# Altium PCB DevBoard.PcbDoc
Units mm, origin at the board's own origin, x right, y up, seen from the top; angles counter-clockwise.
Board outline 53.5 x 96.2 mm, 2 copper layers (Top Layer, Bottom Layer); 17 components, 33 nets, 114 pads, 0 vias.
Unrouted connection lines stored in the file: 10.
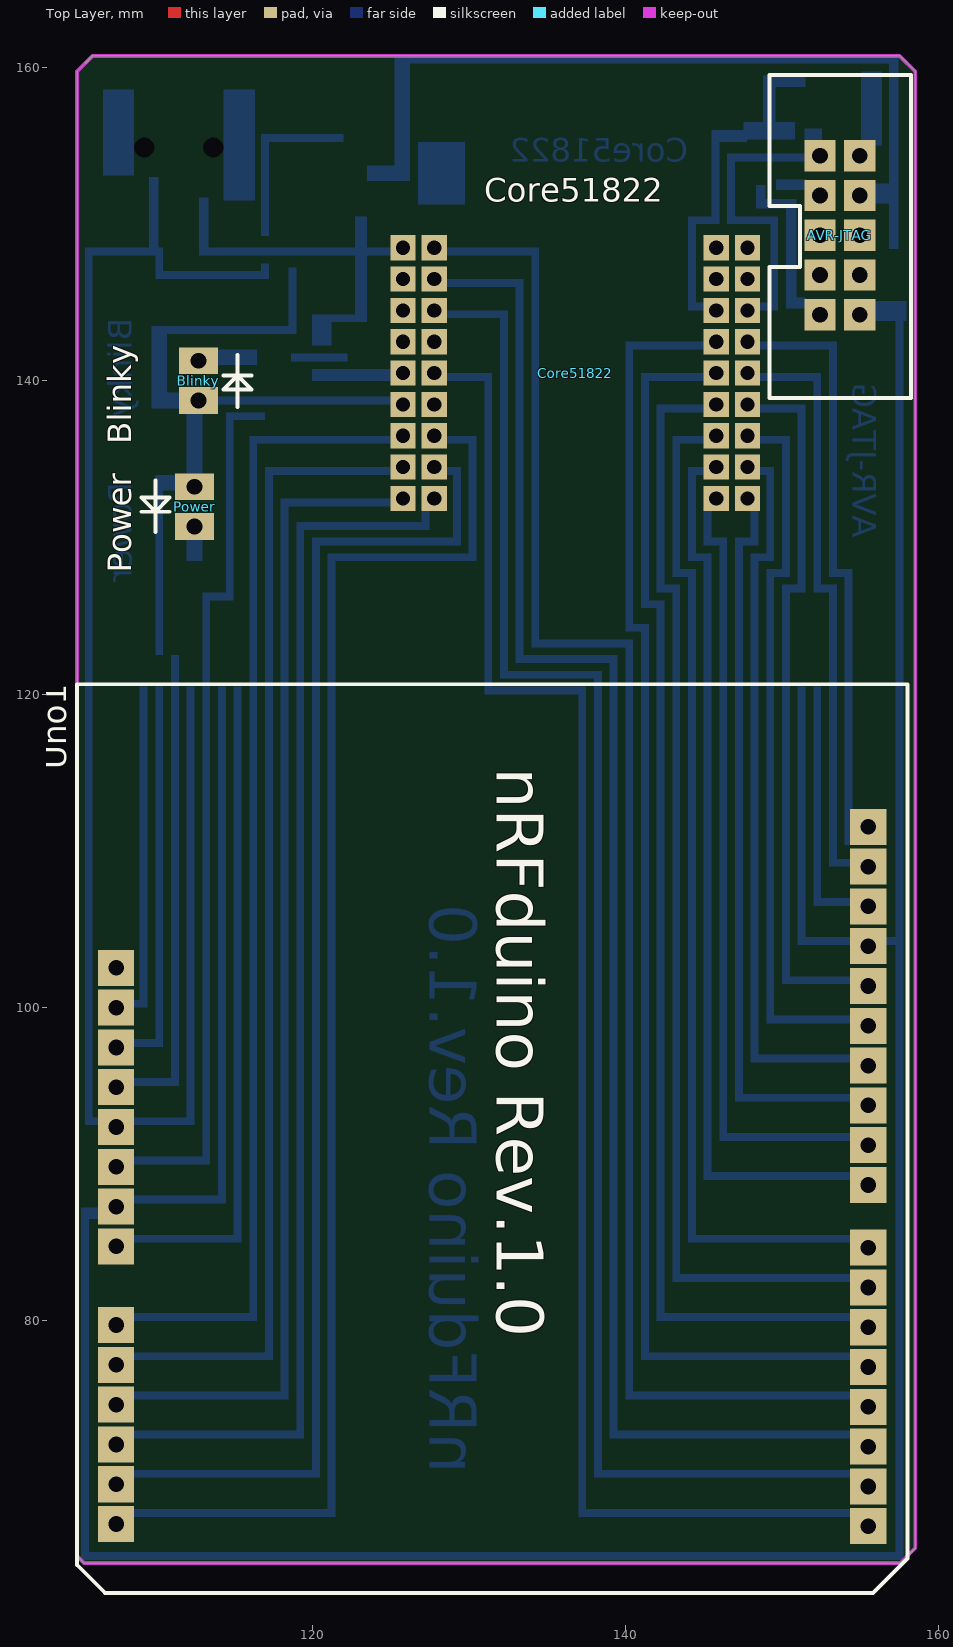
[diagram p0: Top Layer view]
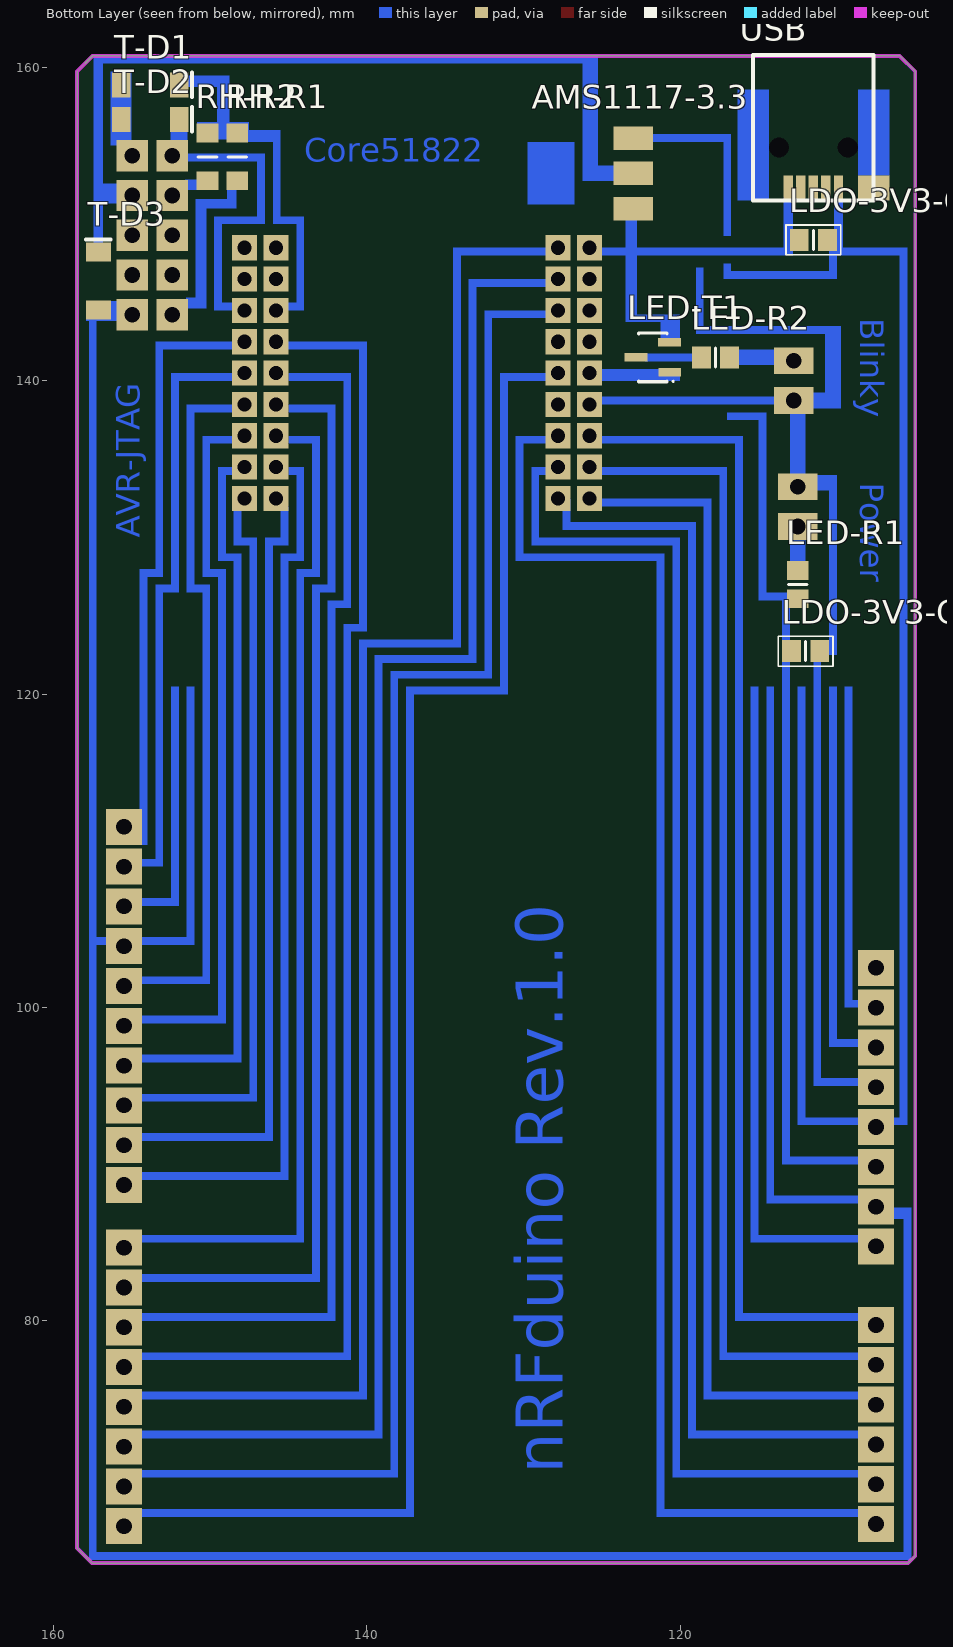
[diagram p1: Bottom Layer view, seen from below]
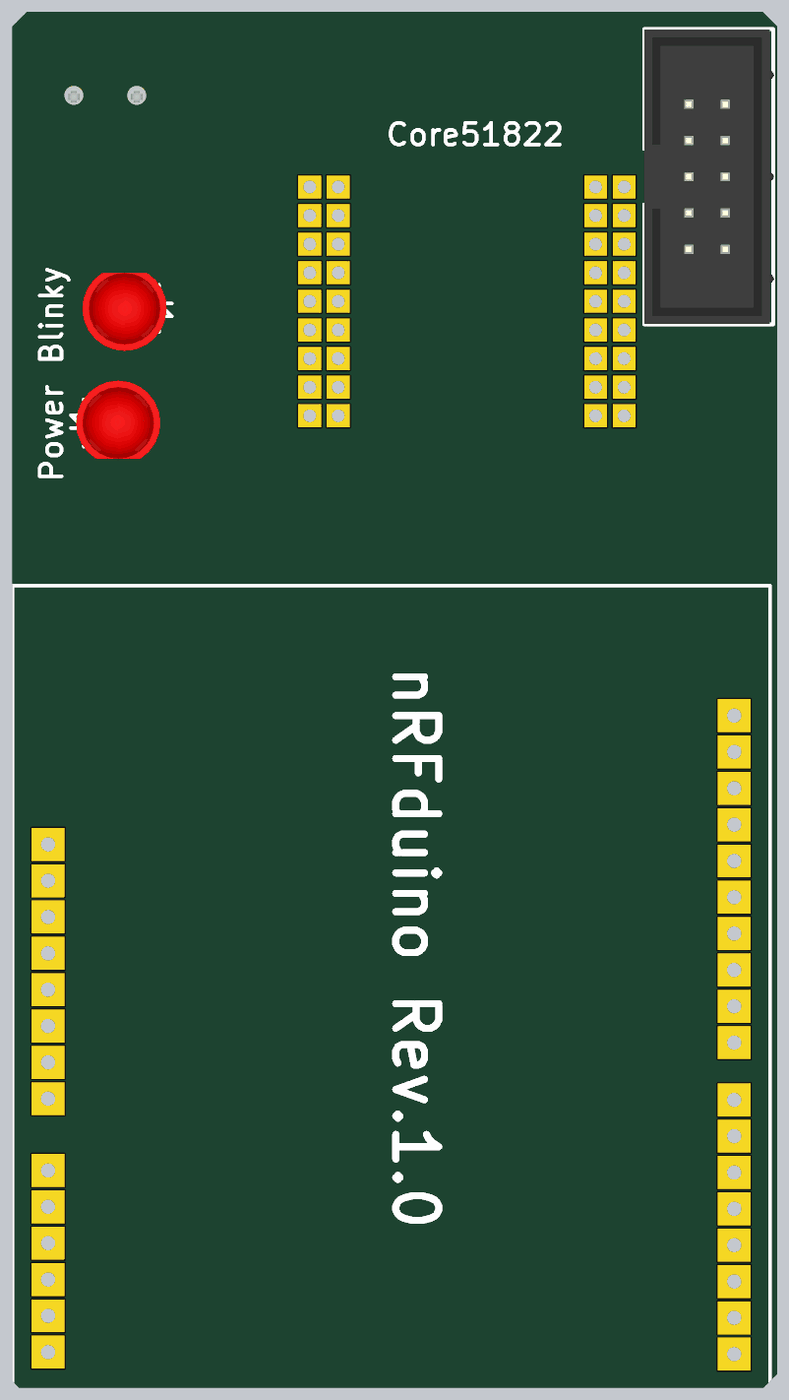
[diagram p2: 3D render of the assembled board from above, using the file's embedded part models]
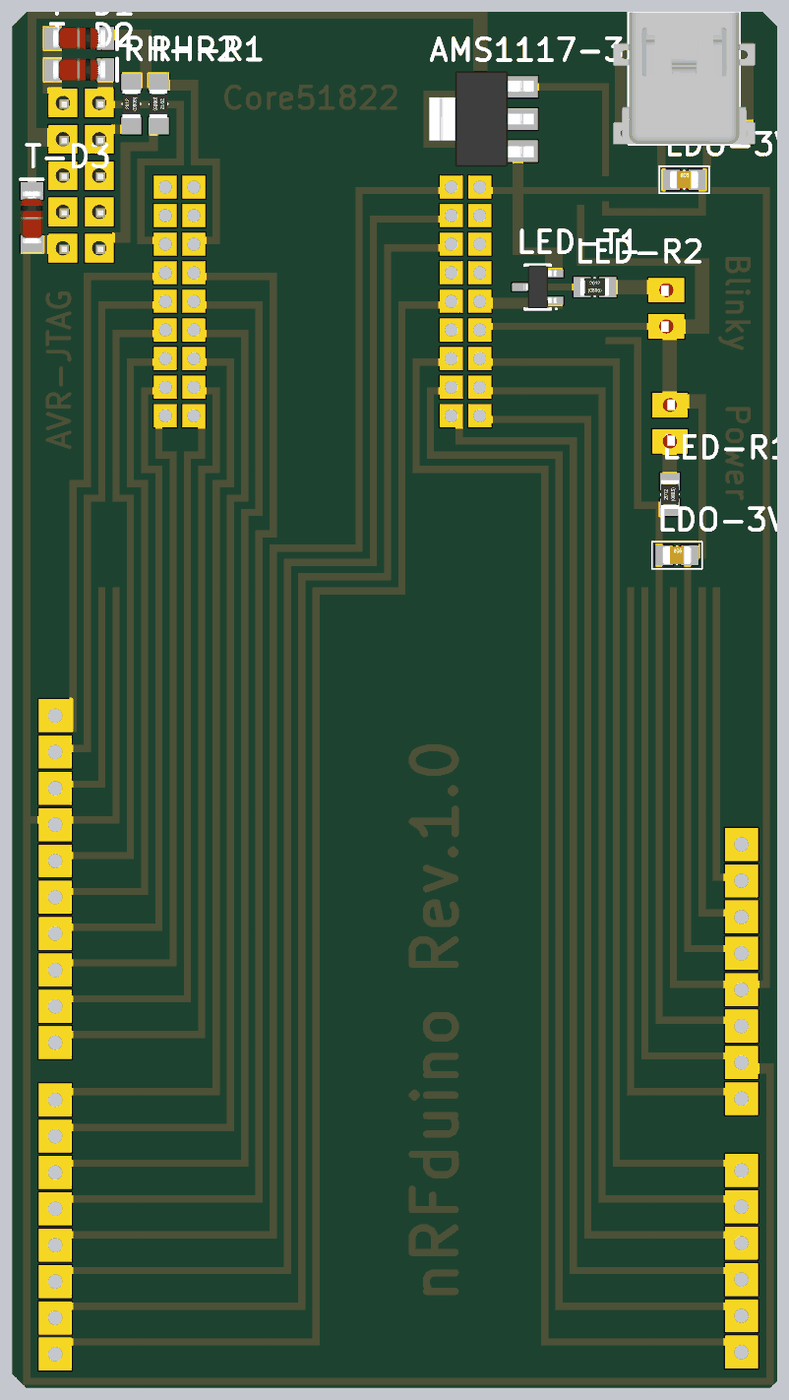
[diagram p3: 3D render of the assembled board from below, using the file's embedded part models]

## Layer stack, top to bottom
Top Solder: solder mask 0.0102, Solder Resist, Dk 3.5
Top Layer: signal copper 0.0356
Dielectric 1: dielectric 0.32, FR-4, Dk 4.8
Bottom Layer: signal copper 0.0356
Bottom Solder: solder mask 0.0102, Solder Resist, Dk 3.5

## Board outline
105,65 105.45,64.55 157.55,64.55 158.5,65.5 158.5,159.75 157.5,160.75 106,160.75 105,159.75

## Design rules (kind name [scope] priority, off if disabled: settings)
Clearance [All] p1: gap=0.254
PolygonConnect [All] p1: connectstyle=Relief reliefconductorwidth=0.254 reliefentries=4 polygonreliefangle="90 Angle" airgapwidth=0.254
RoomDefinition "Voltage Regulator" [InComponentClass('Voltage Regulator')] p1: confinementstyle=ConfineIn formatcopy=TRUE lockcomponents=FALSE outline 0,0 50.8,0 50.8,25.4 0,25.4
RoomDefinition USB [InComponentClass('USB')] p2: confinementstyle=ConfineIn formatcopy=TRUE lockcomponents=FALSE outline 0,0 50.8,0 50.8,25.4 0,25.4
RoomDefinition Top [InComponentClass('Top')] p3: confinementstyle=ConfineIn formatcopy=TRUE lockcomponents=FALSE outline 0,0 50.8,0 50.8,25.4 0,25.4
RoomDefinition Programmer [InComponentClass('Programmer')] p4: confinementstyle=ConfineIn formatcopy=TRUE lockcomponents=FALSE outline 0,0 50.8,0 50.8,25.4 0,25.4
RoomDefinition JTAG-to-SWD [InComponentClass('JTAG-to-SWD')] p5: confinementstyle=ConfineIn formatcopy=TRUE lockcomponents=FALSE outline 0,0 50.8,0 50.8,25.4 0,25.4
RoutingVias [All] p1: holewidth=0.711 width=1.27 viastyle="Through Hole" minholewidth=0.711 minwidth=1.27 maxholewidth=0.711 maxwidth=1.27
SolderMaskExpansion [All] p1: expansion=0.102
Width [All] p1: maxlimit=0.254 minlimit=0.254 preferedwidth=0.254
30 further rules are at their usual default settings.

## Classes and differential pairs
component class "Voltage Regulator": AMS1117-3.3 LDO-3V3-C1 LDO-3V3-C2
component class USB: LED-R1 Power USB
component class Top: Blinky Core51822 LED-R2 LED-T1 Uno1
component class JTAG-to-SWD: RH-R1 RH-R2
component class Programmer: AVR-JTAG T-D1 T-D2 T-D3

## Components (designator, comment, footprint, x,y, rotation, side; value= is the part's Value field where it differs from the comment)
AMS1117-3.3 "AMS1117" SOT-223-3 122.25,150 r90 bottom
AVR-JTAG "AVR Style" "Header 2x5 IDC-10S" 152.425,154.375 r0 top
Blinky "TH Blue" "LED 3mm" 112.75,138.75 r90 top
Core51822 "Core51822_2" Core51822 124.8,131.5 r0 top
LDO-3V3-C1 "1uF" "C 0805 / 2012" 111.5,149 r180 bottom
LDO-3V3-C2 "1uF" "C 0805 / 2012" 112,122.75 r180 bottom
LED-R1 "?R" "R 0805 / 2012" 112.5,127 r90 bottom
LED-R2 "?R" "R 0805 / 2012" 117.75,141.5 r180 bottom
LED-T1 "2N7000" SOT-23-3 121.75,141.5 r90 bottom
Power "TH Green" "LED 3mm" 112.5,133.25 r270 top
RH-R1 "390R" "R 0805 / 2012 wide" 148.275,154.3 r270 bottom
RH-R2 "390R" "R 0805 / 2012 wide" 150.175,154.3 r90 bottom
T-D1 "BZV55-B3V3" Minimelf 153.825,158.875 r0 bottom
T-D2 "BZV55-B3V3" Minimelf 153.825,156.675 r0 bottom
T-D3 "BZV55-B3V3" Minimelf 157.125,146.375 r270 bottom
Uno1 "Arduino Uno" "ARDUINO UNO ADAPTER" 131.5,93 r270 top
USB "P-miniUSB" miniUSB 111.5,156 r0 bottom

## Footprints (in the part's own frame and the unit in brackets; to place one, negate y for a bottom-side part, rotate by r counter-clockwise, add the part's x,y. Pads: shape width x height; smd on the part's side, far side on the other; paste and mask are expansions set on the pad)
"ARDUINO UNO ADAPTER" [mm]
  rect 2.3x2.3 hole 1: 0(26.1,24) 1(23.56,24) 2(21.02,24) 3(18.48,24) 3V3(-1.92,-24) 4(15.94,24) 5(13.4,24) 5V(0.62,-24) 6(10.86,24) 7(8.32,24) 8(4.32,24) 9(1.78,24) 10(-0.76,24) 11(-3.3,24) 12(-5.84,24) 13(-8.38,24) A0(13.26,-24) A1(15.8,-24) A2(18.34,-24) A3(20.88,-24) A4(23.42,-24) A5(25.96,-24) AREF(-13.46,24) GND1(3.16,-24) GND2(5.7,-24) GND3(-10.92,24) IOREF(-7,-24) NC(-9.54,-24) RESET(-4.46,-24) SCL(-18.54,24) SDA(-16,24) Vin(8.24,-24)
  Bottom Layer region: -16.5,21.5 -16,21.5 -16,23 -16.5,23
  Bottom Layer region: -27.5,21.5 -16,21.5 -16,22 -27.5,22
  Bottom Layer region: -27.5,22.5 -17.39,22.5 -17.39,23 -27.5,23
  Bottom Layer region: -27.5,20.5 -13.5,20.5 -13.5,21 -27.5,21
  Bottom Layer region: -27.5,19.5 -11,19.5 -11,20 -27.5,20
  Bottom Layer region: -27.5,18.5 -8.5,18.5 -8.5,19 -27.5,19
  Bottom Layer region: -27.5,17.5 -6,17.5 -6,18 -27.5,18
  Bottom Layer region: -27.5,16.5 -3.5,16.5 -3.5,17 -27.5,17
  Bottom Layer region: -27.5,15.5 -1,15.5 -1,16 -27.5,16
  Bottom Layer region: -27.5,14.5 1.5,14.5 1.5,15 -27.5,15
  Bottom Layer region: -27.5,13.5 4,13.5 4,14 -27.5,14
  Bottom Layer region: -27.5,12.5 8,12.5 8,13 -27.5,13
  Bottom Layer region: -27.5,11.5 10.5,11.5 10.5,12 -27.5,12
  Bottom Layer region: -27.5,10.5 13,10.5 13,11 -27.5,11
  Bottom Layer region: -27.5,5.5 25.5,5.5 25.5,6 -27.5,6
  Bottom Layer region: -27.5,6.5 23,6.5 23,7 -27.5,7
  Bottom Layer region: -27.5,7.5 20.5,7.5 20.5,8 -27.5,8
  Bottom Layer region: -27.5,8.5 18,8.5 18,9 -27.5,9
  Bottom Layer region: -27.5,9.5 15.5,9.5 15.5,10 -27.5,10
  Bottom Layer region: -14,20.5 -13.5,20.5 -13.5,23 -14,23
  Bottom Layer region: -11.5,19.5 -11,19.5 -11,23 -11.5,23
  Bottom Layer region: -9,18.5 -8.5,18.5 -8.5,23 -9,23
  Bottom Layer region: -6.5,17.5 -6,17.5 -6,23 -6.5,23
  Bottom Layer region: -4,16.5 -3.5,16.5 -3.5,23 -4,23
  Bottom Layer region: -1.5,15.5 -1,15.5 -1,23 -1.5,23
  Bottom Layer region: 1,14.5 1.5,14.5 1.5,23 1,23
  Bottom Layer region: 3.5,13.5 4,13.5 4,23 3.5,23
  Bottom Layer region: 7.5,12.5 8,12.5 8,23 7.5,23
  Bottom Layer region: 17.5,-23.5 18,-23.5 18,-13 17.5,-13
  Bottom Layer region: 15,-23.5 15.5,-23.5 15.5,-14 15,-14
  Bottom Layer region: 12.5,-23.5 13,-23.5 13,-15 12.5,-15
  Bottom Layer region: 7.5,-23.5 8,-23.5 8,-16 7.5,-16
  Bottom Layer region: 5,-23.5 5.5,-23.5 5.5,-17 5,-17
  Bottom Layer region: 2.5,-23.5 3,-23.5 3,-18 2.5,-18
  Bottom Layer region: 0,-23.5 0.5,-23.5 0.5,-19 0,-19
  Bottom Layer region: -2.5,-23.5 -2,-23.5 -2,-20 -2.5,-20
  Bottom Layer region: -5,-23.5 -4.5,-23.5 -4.5,-21 -5,-21
  Bottom Layer region: -27.5,-10.5 25.5,-10.5 25.5,-10 -27.5,-10
  Bottom Layer region: -27.5,-11.5 23,-11.5 23,-11 -27.5,-11
  Bottom Layer region: -27.5,-12.5 20.5,-12.5 20.5,-12 -27.5,-12
  Bottom Layer region: -27.5,-13.5 18,-13.5 18,-13 -27.5,-13
  Bottom Layer region: -27.5,-14.5 15.5,-14.5 15.5,-14 -27.5,-14
  Bottom Layer region: -27.5,-15.5 13,-15.5 13,-15 -27.5,-15
  Bottom Layer region: -27.5,-16.5 8,-16.5 8,-16 -27.5,-16
  Bottom Layer region: -27.5,-17.5 5.5,-17.5 5.5,-17 -27.5,-17
  Bottom Layer region: -27.5,-18.5 3,-18.5 3,-18 -27.5,-18
  Bottom Layer region: -27.5,-19.5 0.5,-19.5 0.5,-19 -27.5,-19
  Bottom Layer region: -27.5,-20.5 -2,-20.5 -2,-20 -27.5,-20
  Bottom Layer region: -27.5,-21.5 -4.5,-21.5 -4.5,-21 -27.5,-21
  Bottom Layer region: -27.5,-22.5 -7,-22.5 -7,-22 -27.5,-22
  Bottom Layer region: -7.5,-23.5 -7,-23.5 -7,-22 -7.5,-22
  Bottom Layer region: 20,-24 20.5,-24 20.5,-12 20,-12
  Bottom Layer region: 22.5,-24 23,-24 23,-11 22.5,-11
  Bottom Layer region: 25,-24 25.5,-24 25.5,-10 25,-10
  Bottom Layer region: 25,5.5 25.5,5.5 25.5,23 25,23
  Bottom Layer region: 22.5,6.5 23,6.5 23,23 22.5,23
  Bottom Layer region: 20,7.5 20.5,7.5 20.5,23 20,23
  Bottom Layer region: 17.5,8.5 18,8.5 18,23 17.5,23
  Bottom Layer region: 15,9.5 15.5,9.5 15.5,23 15,23
  Bottom Layer region: 12.5,10.5 13,10.5 13,23 12.5,23
  Bottom Layer region: 10,11.5 10.5,11.5 10.5,23 10,23
  silkscreen extent -27.64,-26.5 30.36,26.5
"C 0805 / 2012" [mm] "Capacitor 0805 / 2012 (2.0 x 1.2 mm)"
  rect 1.2x1.4 smd: 1(-0.9,0) 2(0.9,0)
  silkscreen extent -1.75,-0.95 1.75,0.95, body extent -1,-0.62 1,0.63, height 0.78
Core51822 [mm]
  rect 1.6x1.6 hole 0.9: 1(1,17) 2(3,17) 3(1,15) 4(3,15) 5(1,13) 6(3,13) 7(1,11) 8(3,11) 9(1,9) 10(3,9) 11(1,7) 12(3,7) 13(1,5) 14(3,5) 15(1,3) 16(3,3) 17(1,1) 18(3,1) 19(21,17) 20(23,17) 21(21,15) 22(23,15) 23(21,13) 24(23,13) 25(21,11) 26(23,11) 27(21,9) 28(23,9) 29(21,7) 30(23,7) 31(21,5) 32(23,5) 33(21,3) 34(23,3) 35(21,1) 36(23,1)
"Header 2x5 IDC-10S" [mm]
  rect 2x2 hole 1: 1(0,0) 2(2.54,0) 3(0,-2.54) 4(2.54,-2.54) 5(0,-5.08) 6(2.54,-5.08) 7(0,-7.62) 8(2.54,-7.62) 9(0,-10.16) 10(2.54,-10.16)
  silkscreen extent -3.22,-15.48 5.8,5.16, body extent -3.22,-15.46 5.88,5.14, height 9.3
"LED 3mm" [mm] "2.54mm"
  rect 1.7x2.5 hole 1: 1(0,0) 2(2.54,0)
  silkscreen extent -0.4,-3.4 2.9,-1.6, body extent -1.71,-3.05 3.74,2.85, height 18.6
Minimelf [mm]
  rect 1.2x1.6 smd: 1(-1.85,-0.013) 2(1.85,-0.013)
  silkscreen extent -2.65,-0.8 -2.65,0.75, body extent -1.85,-0.8 1.85,0.77, height 1.6
miniUSB [mm]
  rect 0.6x1.6 smd: 1(-1.6,3.7) 2(-0.8,3.7) 3(0,3.7) 4(0.8,3.7) 5(1.6,3.7)
  rect 2x1.6 smd: 6(-3.85,3.7)
  rect 0x0 hole 1.3: 10(-2.2,1.1) 20(2.2,1.1)
  Top Layer region: -4.85,2.9 -2.85,2.9 -2.85,-2.6 -4.85,-2.6
  Top Layer region: 2.85,4.5 4.85,4.5 4.85,-1 2.85,-1
  Top Layer region: 2.85,-1 4.85,-1 4.85,-2.6 2.85,-2.6
  silkscreen extent -3.85,-4.8 3.85,4.5, body extent -4.95,-4.7 4.95,4.5, height 4.14
"R 0805 / 2012" [mm] "Resistor 0805 / 2012 (2.0 x 1.2 mm)"
  rect 1.2x1.4 smd: 1(-0.9,0) 2(0.9,0)
  silkscreen extent 0,-0.6 0,0.6, body extent -1,-0.63 1,0.62, height 0.45
"R 0805 / 2012 wide" [mm] "Resistor 0805 / 2012 (2.0 x 1.2 mm)"
  rect 1.2x1.4 smd: 1(-1.524,0) 2(1.524,0)
  silkscreen extent 0,-0.6 0,0.6, body extent -1,-0.63 1,0.62, height 0.45
SOT-23-3 [mm]
  rect 0.55x1.45 smd: 1(-0.95,-1.075) 2(0.965,-1.067) 3(0,1.067)
  silkscreen extent -1.57,-1.35 1.55,0.9, body extent -1.49,-1.32 1.51,1.28, height 1.1
SOT-223-3 [mm]
  rect 1.5x2.5 smd: 1(1,0.75) 2(3.25,0.75) 3(5.5,0.75)
  Top Layer region: 1.25,7.5 5.25,7.5 5.25,4.5 1.25,4.5
  body extent -0.1,-0.22 6.6,7.08, height 1.8

## Part data
AMS1117-3.3: "LDO 3.3V/5V/12V"
AVR-JTAG: library part "Header JTAG AVR"
Blinky Power: library part LED
LDO-3V3-C1 LDO-3V3-C2: library part Capacitor
LED-R1 LED-R2 RH-R1 RH-R2: library part Resistor
LED-T1: "N-FET"
T-D1 T-D2 T-D3: library part "Zener Diode"
USB: library part miniUSB

## Nets (pads, with @x,y where several pads share a name; then routed paths per layer and width w, separated by ;. In a path a pad name is that pad's centre, name@x,y a point inside that pad or via, vN(x,y) a via of type N, cw(c..) or ccw(c..) an arc to the next point about the centre after c; other vN are vias at no path point)
3.3V: AMS1117-3.3.2 AVR-JTAG.4 AVR-JTAG.7 Blinky.1 Core51822.11 LDO-3V3-C2.2 Power.1 T-D3.1 Uno1.3V3 Uno1.IOREF
5V: AMS1117-3.3.3 LDO-3V3-C1.2 Uno1.5V USB.1
GND: AMS1117-3.3.1 AVR-JTAG.2 AVR-JTAG.10 Core51822.1 LDO-3V3-C1.1 LDO-3V3-C2.1 LED-R1.1 LED-T1.2 T-D1.2 T-D2.2 T-D3.2 Uno1.GND1 Uno1.GND2 Uno1.GND3 USB.5
NetBlinky_2: Blinky.2 LED-R2.2
NetCore51822_2: Core51822.2 Uno1.3
NetCore51822_4: Core51822.4 Uno1.2
NetCore51822_5: Core51822.5 LED-T1.1
NetCore51822_6: Core51822.6 Uno1.1
NetCore51822_10: Core51822.10 Uno1.0
NetCore51822_13: Core51822.13 Uno1.A0
NetCore51822_14: Core51822.14 Uno1.A5
NetCore51822_15: Core51822.15 Uno1.A1
NetCore51822_16: Core51822.16 Uno1.A4
NetCore51822_17: Core51822.17 Uno1.A2
NetCore51822_18: Core51822.18 Uno1.A3
NetCore51822_25: Core51822.25 Uno1.4
NetCore51822_26: Core51822.26 Uno1.SCL
NetCore51822_27: Core51822.27 Uno1.5
NetCore51822_28: Core51822.28 Uno1.SDA
NetCore51822_29: Core51822.29 Uno1.6
NetCore51822_30: Core51822.30 Uno1.13
NetCore51822_31: Core51822.31 Uno1.7
NetCore51822_32: Core51822.32 Uno1.12
NetCore51822_33: Core51822.33 Uno1.8
NetCore51822_34: Core51822.34 Uno1.11
NetCore51822_35: Core51822.35 Uno1.9
NetCore51822_36: Core51822.36 Uno1.10
NetLED-R1_2: LED-R1.2 Power.2
NetLED-R2_1: LED-R2.1 LED-T1.3
SWDCLK: AVR-JTAG.1 Core51822.24 T-D2.1
SWDIO: Core51822.23 RH-R1.1 RH-R2.2 T-D1.1
TDI: AVR-JTAG.9 RH-R1.2
TDO: AVR-JTAG.3 RH-R2.1
pads on no net: AVR-JTAG.5 AVR-JTAG.6 AVR-JTAG.8 Core51822.3 Core51822.7 Core51822.8 Core51822.9 Core51822.12 Core51822.19 Core51822.20 Core51822.21 Core51822.22 Uno1.AREF Uno1.NC Uno1.RESET Uno1.Vin USB.2 USB.3 USB.4 USB.6 USB.10 USB.20

## Keep-outs
Keep-Out Layer:
  the board outline again, w0.254

## Other copper
Bottom Layer:
  region net TDO: 151.6,152.85 149.6,152.85 149.6,152.2 151.6,152.2
  rectangle net 5V: 110,147 110.5,148.5
  rectangle net 5V: 110,146.5 116.75,147
  rectangle net 5V: 116.75,146.5 117.25,147.5
  rectangle net 5V: 116.75,149.25 117.25,155.25
  rectangle net 5V: 116.75,155.25 122,155.75
  rectangle net 3.3V: 123.5,152.75 125.25,153.75
  rectangle net 3.3V: 125.25,152.75 126.25,160.25
  rectangle net GND: 121.25,143.75 122.75,144.25
  rectangle net GND: 120,142.25 121.25,144.25
  rectangle net GND: 122.75,143.75 123.5,150.5
  rectangle net 3.3V: 125.25,160.25 156.835,160.75
  region net GND: 157.935,145.116 155.535,145.116 155.535,143.816 157.935,143.816
  rectangle net GND: 105.75,86.5 106.5,87.25
  rectangle net GND: 105.25,64.75 105.75,87.25
  rectangle net GND: 105.75,64.75 157.25,65.25
  rectangle net GND: 157.25,64.75 157.75,144.525
  rectangle net GND: 156.5,104 157.75,104.5
  region net 3.3V: 157.135,152.616 155.735,152.616 155.735,151.316 157.135,151.316
  region net 3.3V: 157.435,160.75 156.835,160.75 156.835,148.416 157.435,148.416
  rectangle net SWDIO: 146,155.25 147.75,156
  rectangle net SWDIO: 145.5,150.5 146,156
  rectangle net SWDIO: 144.5,150 146,150.5
  rectangle net SWDIO: 144,145 144.5,150.5
  rectangle net SWDIO: 144,144.5 145.25,145
  region net SWDIO: 149.575,159.5 148.775,159.5 148.775,155.9 149.575,155.9
  region net SWDIO: 151.5,159.5 149.4,159.5 149.4,158.75 151.5,158.75
  region net TDI: 148.935,152.516 148.335,152.516 148.335,151.016 148.935,151.016
  region net TDI: 151.535,145.316 150.235,145.316 150.235,144.616 151.535,144.616
  region net TDI: 150.935,151.616 150.235,151.616 150.235,145.316 150.935,145.316
  region net TDI: 150.335,151.616 148.935,151.616 148.935,151.016 150.335,151.016
  region net SWDCLK: 152.535,156.116 151.435,156.116 151.435,155.316 152.535,155.316
  rectangle net SWDCLK: 149.25,145 149.75,150.25
  rectangle net SWDCLK: 148,144.5 149.75,145
  rectangle net SWDCLK: 146.5,150 149.75,150.5
  rectangle net SWDCLK: 146.5,150 147,154.5
  rectangle net GND: 115,137.5 117,138
  rectangle net GND: 114.5,126.5 115,138
  rectangle net GND: 113.5,126 115,126.5
  rectangle net NetLED-R1_2: 112,128.5 113,130
  rectangle net 3.3V: 110,133 111.5,134
  rectangle net 3.3V: 110,122.5 110.5,134
  rectangle net 3.3V: 111,120 111.5,122.5
  rectangle net GND: 113,120 113.5,126.5
  rectangle net 3.3V: 112,138.5 125.5,139
  rectangle net 3.3V: 109.75,138.25 110.75,143.5
  rectangle net 5V: 105.75,148 109.9,148.5
  rectangle net 5V: 109.6,148 110.2,153
  rectangle net GND: 113.25,148 125.25,148.5
  rectangle net GND: 112.8,148 113.4,151.7
  rectangle net 5V: 105.5,93 106,148.5
  rectangle net 5V: 105.5,92.5 106.5,93
  region net GND: 156.375,159.75 155.035,159.75 155.035,155.016 156.375,155.016
  region: 155.835,156.316 155.135,156.316 155.135,155.316 155.835,155.316
  region net SWDIO: 150.835,156.516 147.535,156.516 147.535,155.416 150.835,155.416
  rectangle net SWDCLK: 146.723,154 151.803,154.5
  rectangle net NetCore51822_36: 147,129.5 148.5,130
  rectangle net NetCore51822_34: 148,128.5 149.5,129
  rectangle net NetCore51822_32: 149,127.5 150.5,128
  rectangle net NetCore51822_30: 150,126.5 151.5,127
  rectangle net NetCore51822_28: 152,126.5 153.5,127
  rectangle net NetCore51822_26: 153,127.5 154.5,128
  rectangle net NetCore51822_26: 154,120 154.5,128
  rectangle net NetCore51822_26: 153,127.5 153.5,131
  rectangle net NetCore51822_28: 152,126.5 152.5,131
  rectangle net NetCore51822_28: 153,120 153.5,127
  rectangle net NetCore51822_30: 151,126.5 151.5,131
  rectangle net NetCore51822_30: 150,120 150.5,127
  rectangle net NetCore51822_32: 150,127.5 150.5,131
  rectangle net NetCore51822_32: 149,120 149.5,128
  rectangle net NetCore51822_34: 148,120 148.5,129
  rectangle net NetCore51822_34: 149,128.5 149.5,131
  rectangle net NetCore51822_36: 148,129.5 148.5,131
  rectangle net NetCore51822_36: 147,120 147.5,130
  rectangle net NetCore51822_33: 144,128.5 145.5,129
  rectangle net NetCore51822_31: 143,127.5 144.5,128
  rectangle net NetCore51822_29: 142,126.5 143.5,127
  rectangle net NetCore51822_27: 141,125.5 142.5,126
  rectangle net NetCore51822_35: 145,129.5 146.5,130
  rectangle net NetCore51822_35: 146,120 146.5,130
  rectangle net NetCore51822_35: 145,129.5 145.5,131
  rectangle net NetCore51822_33: 144,128.5 144.5,131
  rectangle net NetCore51822_33: 145,120 145.5,129
  rectangle net NetCore51822_31: 144,120 144.5,128
  rectangle net NetCore51822_31: 143,127.5 143.5,131
  rectangle net NetCore51822_29: 142,126.5 142.5,131
  rectangle net NetCore51822_29: 143,120 143.5,127
  rectangle net NetCore51822_27: 142,120 142.5,126
  rectangle net NetCore51822_27: 141,125.5 141.5,131
  rectangle net NetCore51822_25: 140,124 140.5,131
  rectangle net NetCore51822_25: 141,120.5 141.5,124
  rectangle net NetCore51822_13: 116,120 116.5,136.5
  rectangle net NetCore51822_13: 116.5,136 125,136.5
  rectangle net NetCore51822_15: 117,120 117.5,134.5
  rectangle net NetCore51822_15: 117.5,134 125,134.5
  rectangle net NetCore51822_17: 118,132 125,132.5
  rectangle net NetCore51822_17: 118,120 118.5,132
  rectangle net NetCore51822_18: 127,130.5 127.5,132.5
  rectangle net NetCore51822_18: 119,130.5 127,131
  rectangle net NetCore51822_18: 119,120 119.5,130.5
  rectangle net NetCore51822_16: 120,120 120.5,130
  rectangle net NetCore51822_16: 120.5,129.5 129.5,130
  rectangle net NetCore51822_16: 129,130 129.5,134.5
  rectangle net NetCore51822_16: 127.5,134 129,134.5
  rectangle net NetCore51822_14: 121,120 121.5,129
  rectangle net NetCore51822_14: 121.5,128.5 130.5,129
  rectangle net NetCore51822_14: 130,128.5 130.5,136.5
  rectangle net NetCore51822_14: 128,136 130,136.5
  rectangle net NetCore51822_10: 131,120 131.5,140
  rectangle net NetCore51822_10: 128,140 131.5,140.5
  rectangle net NetCore51822_6: 132,121 132.5,144
  rectangle net NetCore51822_6: 128,144 132.5,144.5
  rectangle net NetCore51822_4: 128,146 133.5,146.5
  rectangle net NetCore51822_4: 133,122 133.5,146.5
  rectangle net NetCore51822_35: 145,130.5 145.5,132
  rectangle net NetCore51822_33: 144,134 145,134.5
  rectangle net NetCore51822_33: 144,130.5 144.5,134
  rectangle net NetCore51822_31: 143,136 145,136.5
  rectangle net NetCore51822_31: 143,130.5 143.5,136
  rectangle net NetCore51822_29: 142,138 145,138.5
  rectangle net NetCore51822_29: 142,130.5 142.5,138
  rectangle net NetCore51822_27: 141,140 145,140.5
  rectangle net NetCore51822_27: 141,130.5 141.5,140
  rectangle net NetCore51822_25: 140,142 145.5,142.5
  rectangle net NetCore51822_25: 140,130.5 140.5,142
  rectangle net NetCore51822_2: 128,148 134.5,148.5
  rectangle net NetCore51822_2: 134,123 134.5,148
  rectangle net NetCore51822_34: 148,134 149.5,134.5
  rectangle net NetCore51822_34: 149,130.5 149.5,134
  rectangle net NetCore51822_36: 148,130.5 148.5,132
  rectangle net NetCore51822_32: 148,136 150.5,136.5
  rectangle net NetCore51822_32: 150,130.5 150.5,136
  rectangle net NetCore51822_30: 148,138 151.5,138.5
  rectangle net NetCore51822_30: 151,130.5 151.5,138
  rectangle net NetCore51822_28: 148,140 152.5,140.5
  rectangle net NetCore51822_28: 152,130.5 152.5,140
  rectangle net NetCore51822_26: 148,142 153.5,142.5
  rectangle net NetCore51822_26: 153,130.5 153.5,142
  rectangle: 140,124 141.5,124.5
  rectangle net NetCore51822_2: 134,123 140.5,123.5
  rectangle net NetCore51822_2: 140,120.5 140.5,123.5
  rectangle net NetCore51822_4: 139,119.5 139.5,122.5
  rectangle net NetCore51822_4: 133,122 139.5,122.5
  rectangle net NetCore51822_6: 132,121 138,121.5
  rectangle net NetCore51822_6: 138,120 138.5,121.5
  rectangle net NetCore51822_10: 131,120 137.5,120.5
  rectangle net 3.3V: 112,133.25 113,138.75
  rectangle net NetLED-R2_1: 118.65,141.25 122.25,141.75
  rectangle net NetCore51822_5: 120,140 125.25,140.75
  rectangle net NetBlinky_2: 113.25,141 116.5,142
  rectangle net 3.3V: 118.5,143 119,147.25
  rectangle net 3.3V: 110.25,143 118.5,143.5
  rectangle net 3.3V: 110.25,138.25 111.75,139.25
  text "nRFduino Rev.1.0" at 127.5,70.25 h3 r270

## Silkscreen, mask and mechanical layers (free items; w line width, h text height)
Top Overlay:
  text "Core51822" at 131,151.45 h1.52
  text "Blinky" at 108.45,135.95 h1.52 r90
  text "Power" at 108.45,127.75 h1.52 r90
  text "nRFduino Rev.1.0" at 131.8,115.3 h3 r270